# Allegro board STM32F103_RAK811_THESISNODE.brd
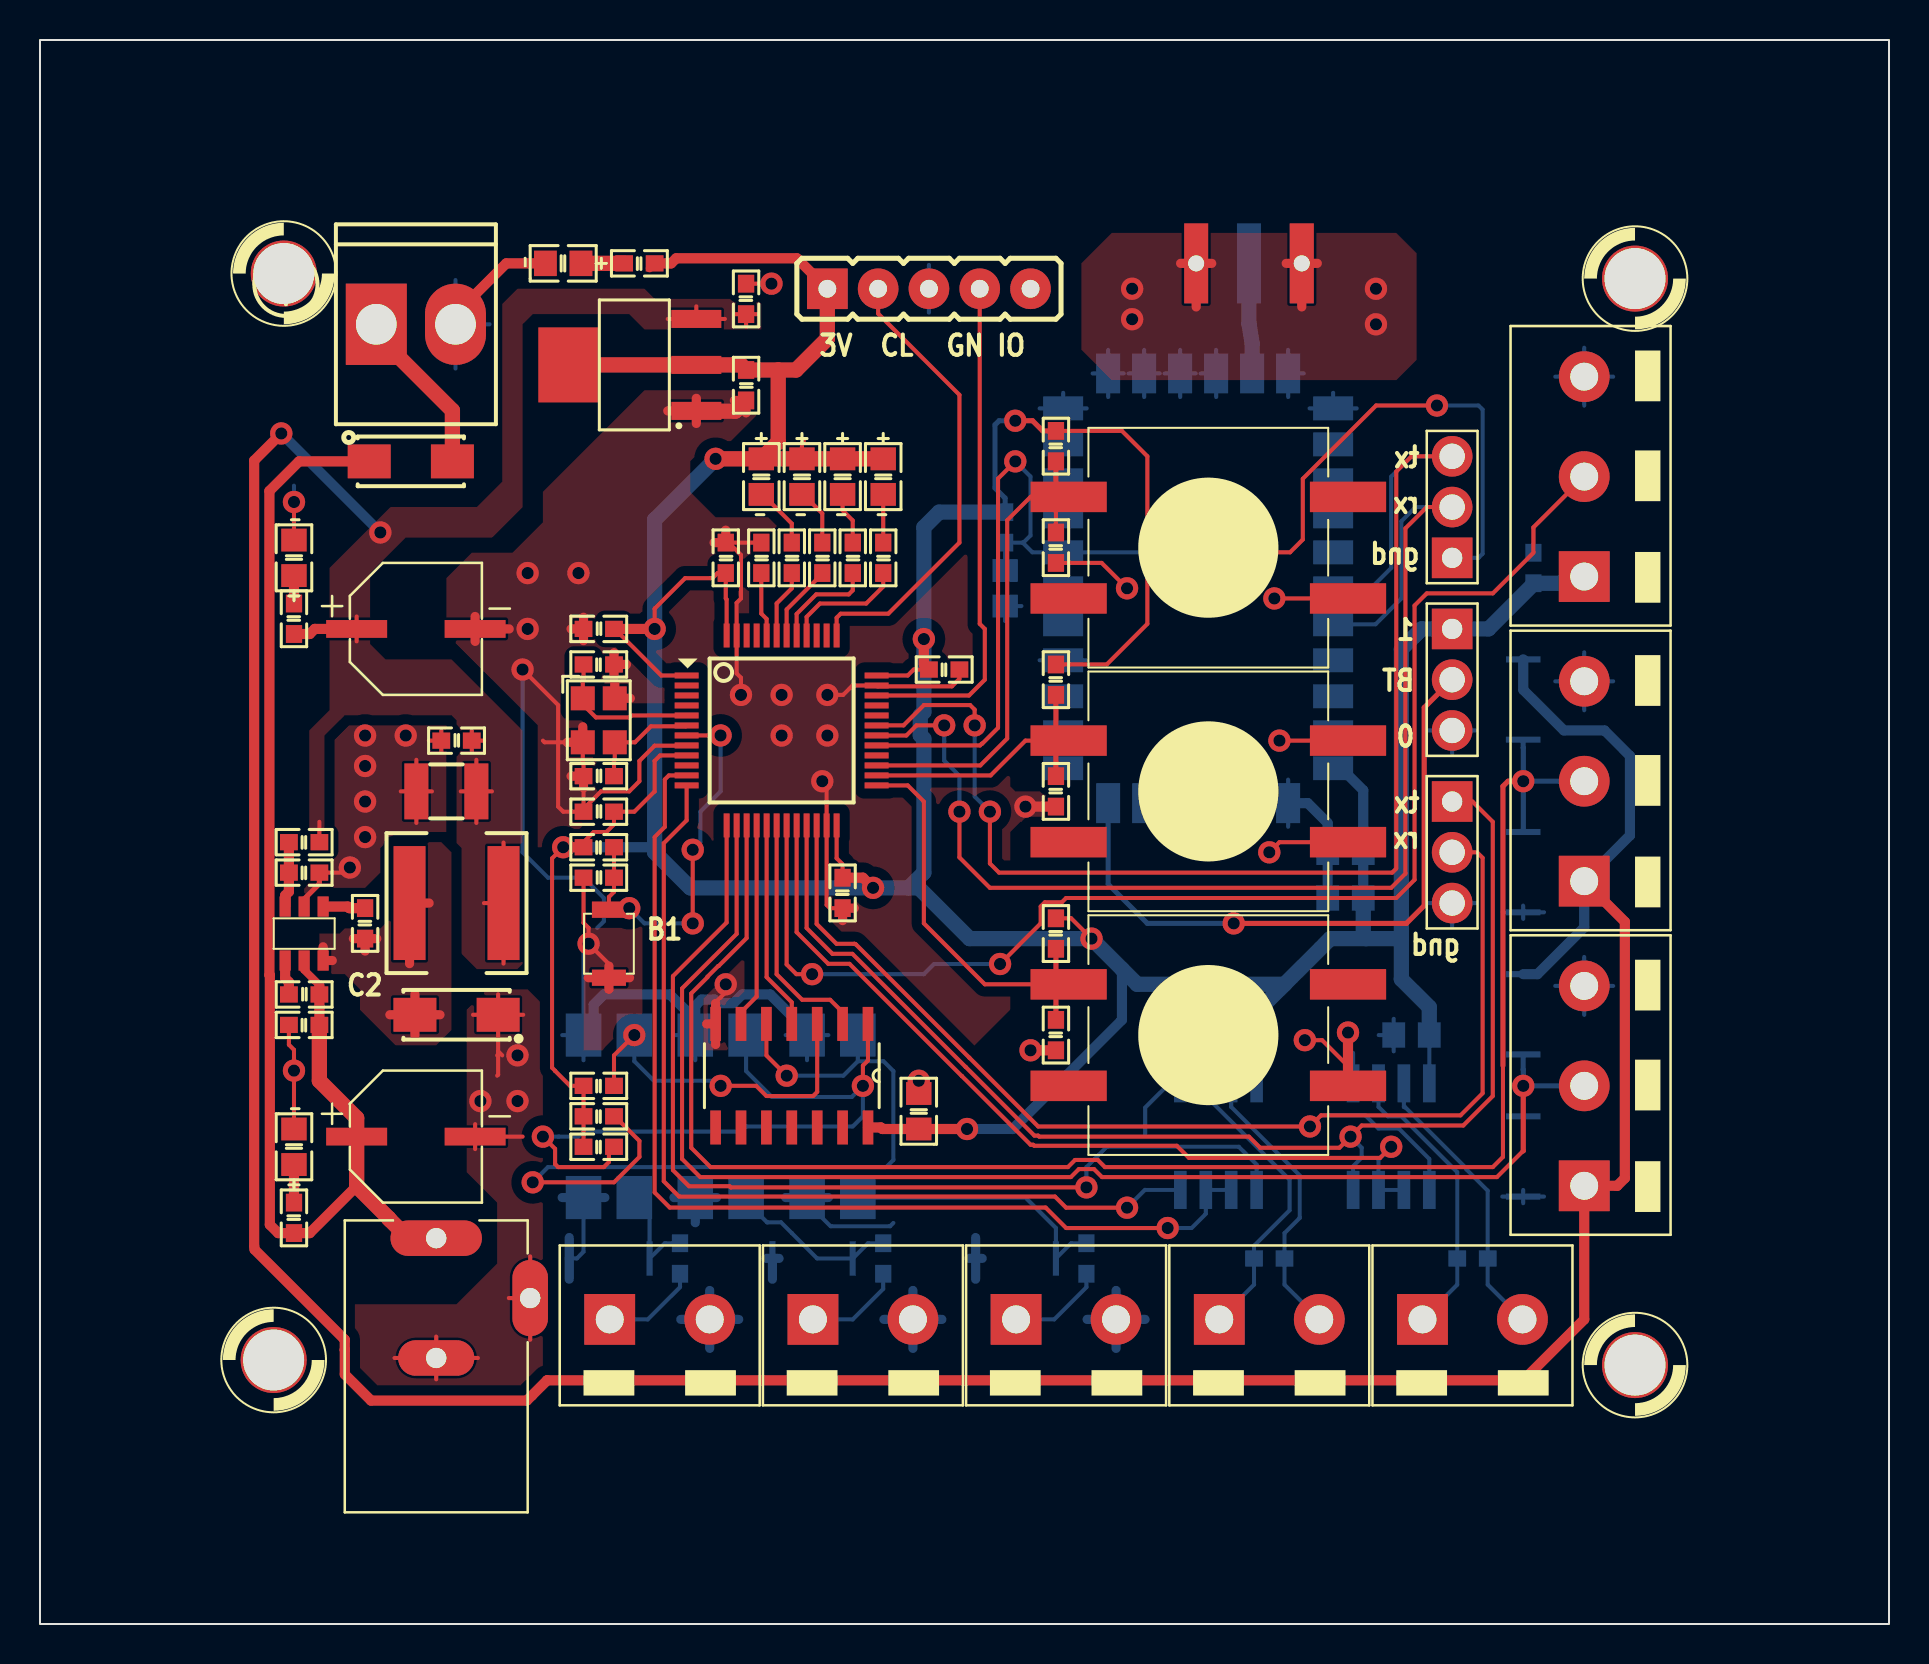
[diagram p0: board, top side]
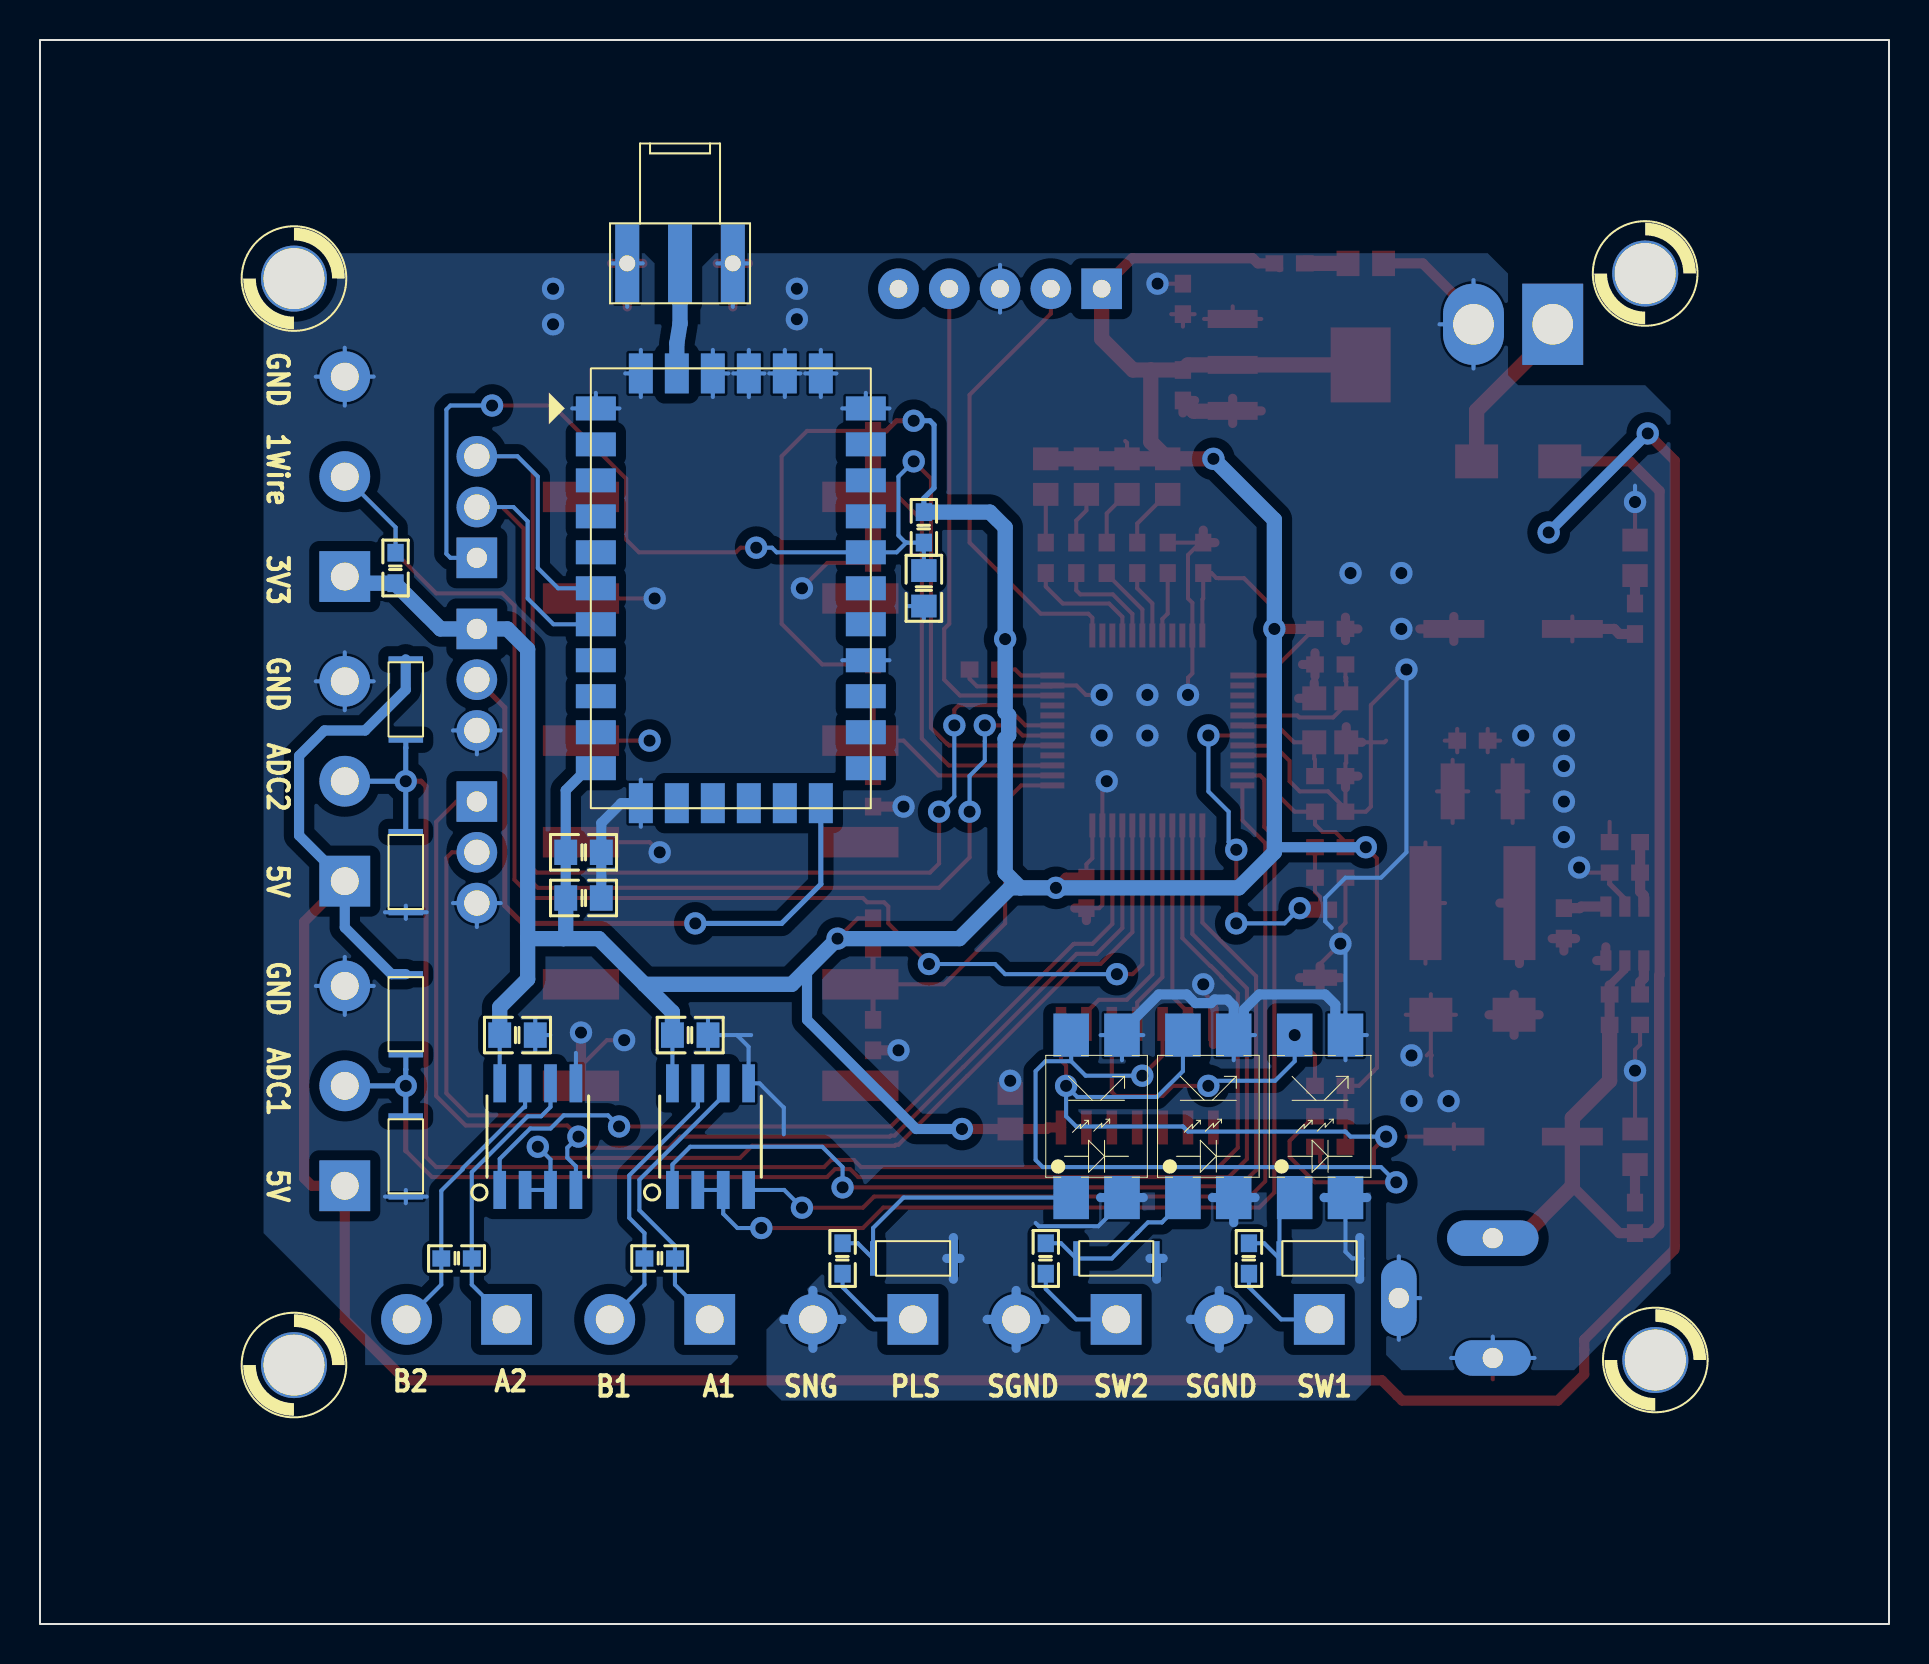
[diagram p1: board, bottom side, seen from below]

Outline 92.46 x 79.25 mm; copper layers: TOP, BOTTOM. Coordinates in mm from the lower left corner of the outline.
Outline path: rectangle 0,0 92.46,79.25

## Design rules (mm)
constraint set DEFAULT: min track width 0.203

## Placement (name value [footprint] x y rotation side)
B1  Reset  [B3U-1000P]  28.45 34.04 270 top
C1  10nF  [C0603]  13.21 29.97 0 top
C2  10nF  [C0603]  16.26 35.05 270 top
C3  100uF/35V  [CAP_AL_D]  18.8 24.38 0 top
C4  220u/16V  [CAP_AL_D]  18.8 49.78 0 top
C5  100nF  [C0603]  20.83 44.2 180 top
C6  22u/6.3V  [CAP_1210]  20.32 41.66 180 top
C7  100nF  [C0603]  35.31 66.29 270 top
C8  100nF  [C0603]  35.31 61.98 90 top
C9  0.1uF/6.3V  [C0603]  34.29 53.34 90 top
C10  0.1uF  [C0603]  27.94 40.64 180 top
C11  0.1uF/6.3V  [C0603]  27.94 49.78 180 top
C12  0.1uF/6.3V  [C0603]  40.13 36.58 270 top
C13  0.1uF/6.3V  [C0603]  45.21 47.75 0 top
C14  18pF  [C0603]  27.94 48.01 0 top
C15  18pF  [C0603]  27.94 42.42 180 top
C16  0.1uF/6.3V  [C0603]  50.8 29.46 270 top
C17  0.1uF/6.3V  [C0603]  50.8 41.66 270 top
C18  0.1uF/6.3V  [C0603]  27.94 37.34 180 top
C19  0.1uF/6.3V  [C0603]  50.8 53.85 270 top
C20  0.1uF  [C0805]  68.58 29.46 0 bottom
C21  0.1uF  [C0805]  59.94 29.46 0 bottom
C22  0.1uF  [C0805]  43.94 25.65 270 top
C23  4.7uF  [C0805]  65.28 38.61 180 bottom
C24  0.1uF  [C0805]  65.28 36.32 180 bottom
C25  0.1uF  [C0805]  48.26 51.82 270 bottom
D1  1N4007  [DO214AC_SMA]  18.54 58.17 0 top
D2  1N5819  [DO214AC_SMA]  20.83 30.48 180 top
D3  LED  [LED0805]  12.7 23.88 90 top
D4  LED  [LED0805]  12.7 53.34 90 top
D5  LED  [LED0805]  26.16 68.07 180 top
D6  LED  [LED0805]  42.16 57.4 270 top
D7  LED  [LED0805]  40.13 57.4 270 top
D8  LED  [LED0805]  38.1 57.4 270 top
D9  LED  [LED0805]  36.07 57.4 270 top
D10  1N4007  [SOD80]  74.17 32.51 0 bottom
D11  1N4007  [SOD80]  74.17 25.4 0 bottom
D12  1N4007  [SOD80]  40.64 18.29 270 bottom
D13  1N4007  [SOD80]  74.17 48.26 0 bottom
D14  1N4007  [SOD80]  30.48 18.29 270 bottom
D15  1N4007  [SOD80]  74.17 39.62 0 bottom
D16  1N4007  [SOD80]  50.8 18.29 270 bottom
E1  ANTENNA_OPTION1  [SMA_EDGE]  60.45 68.07 90 bottom
J1  BAT  [HEADER2-PITCH3P96-B2P_VH]  18.8 65.02 0 top
J2  12VDC  [CONN_JACK_DC]  19.81 19.3 270 top
J3  JTAG/STSW  [HEADER_5]  39.37 66.8 0 top
J4  MCU_DBG  [HEADER3PITCH100MIL]  70.61 38.61 270 top
J5  RAS485_MASTER  [DOMINO2_5]  61.47 15.24 0 top
J6  RS485_SLAVE  [DOMINO2_5]  71.63 15.24 0 top
J7  ANALOG_IN1  [DOMINO3_5]  77.22 26.92 90 top
J8  SW_IN1  [DOMINO2_5]  41.15 15.24 0 top
J9  ANALOG_IN2  [DOMINO3_5]  77.22 42.16 90 top
J10  SW_IN2  [DOMINO2_5]  30.99 15.24 0 top
J11  ONEWIRE  [DOMINO3_5]  77.22 57.4 90 top
J12  PULSE_IN  [DOMINO2_5]  51.31 15.24 0 top
J13  RAK_BOOT  [HEADER3PITCH100MIL]  70.61 47.24 270 top
J14  RAK_DBG  [HEADER3PITCH100MIL]  70.61 55.88 90 top
L1  8.8uH/1.7A  [IND_6X6MM]  20.83 36.07 0 top
MH1  HOLE 4mm  [MH_3MM_1]  12.19 67.56 0 top
MH2  HOLE 4mm  [MH_3MM_1]  11.68 13.21 0 top
MH3  HOLE 4mm  [MH_3MM_1]  79.76 12.95 0 top
MH4  HOLE 4mm  [MH_3MM_1]  79.76 67.31 0 top
R1  10K  [R0603]  13.21 31.5 180 top
R2  4k7  [R0603]  12.7 20.32 270 top
R3  4k7  [R0603]  12.7 50.29 270 top
R4  4k7  [R0603]  29.97 68.07 0 top
R5  49.9K  [R0603]  13.21 39.12 0 top
R6  10K  [R0603]  13.21 37.59 0 top
R7  4k7  [R0603]  36.07 53.34 90 top
R8  4k7  [R0603]  42.16 53.34 90 top
R9  4k7  [R0603]  40.64 53.34 90 top
R10  4k7  [R0603]  39.12 53.34 90 top
R11  4k7  [R0603]  37.59 53.34 90 top
R12  4.7K  [R0603]  27.94 38.86 0 top
R13  10K  [R0603]  50.8 34.54 270 top
R14  10K  [R0603]  50.8 47.24 270 top
R15  10K  [R0603]  50.8 58.93 270 top
R16  100R  [R0603]  71.63 18.29 0 bottom
R17  100R  [R0603]  61.47 18.29 0 bottom
R18  1K  [R0603]  42.16 18.29 270 bottom
R19  1K  [R0603]  32 18.29 270 bottom
R20  10K  [R0603]  74.68 52.83 270 bottom
R21  1K  [R0603]  52.32 18.29 270 bottom
R22  10K  [R0603]  48.26 54.86 270 bottom
R23  100R  [R0603]  27.94 23.88 0 top
R24  100R  [R0603]  27.94 26.92 0 top
R25  100R  [R0603]  27.94 25.4 0 top
SW1  DETECT SW  [TACT_SWITCH_12X12X7MM_SMD]  58.42 29.46 270 top
SW2  DETECT SW  [TACT_SWITCH_12X12X7MM_SMD]  58.42 41.66 270 top
SW3  DETECT SW  [TACT_SWITCH_12X12X7MM_SMD]  58.42 53.85 270 top
U1  AP3211  [SOT23-6]  13.21 34.54 270 top
U2  LM1117 5V  [SOT-223]  29.72 62.99 0 top
U3  STM32F103C8T6  [LQFP_48]  37.08 44.7 270 top
U4  MAX485  [SOIC-8]  58.93 24.38 180 bottom
U5  MAX485  [SOIC-8]  67.56 24.38 180 bottom
U6  Opto  [OPTOSMD]  34.04 25.4 180 bottom
U7  74HC14  [SO_14]  37.59 27.43 270 top
U8  Opto  [OPTOSMD]  28.45 25.4 180 bottom
U9  Opto  [OPTOSMD]  39.62 25.4 180 bottom
U10  -  [RAK811]  57.91 51.82 180 bottom
Y1  12M-18ppm  [CRY3225_M]  27.94 45.21 90 top

## Library data of the parts
B1 = SW PUSHBUTTON-SPST-2_0
C1 C2 C7 C8 C20-C25 = CAP NP
C3 C4 = CAP
C5 = Cap 0603
C6 = CAP NP: User Part Number: PartNr
C9-C19 = CAP NP_0
D1 D10-D16 = DIODE
D2 = SS34_2
D3-D9 = LED_0
E1 = ANTENNA_1
J1 J5 J6 J8 J10 J12 = HEADER 2
J2 = CONN JACK PWR: User Part Number: X; Tolerance: X
J3 = HEADER 5
J4 J7 J9 J11 J13 J14 = HEADER 3
L1 = INDUCTOR
MH1-MH4 = MOUNTING HOLE
R1 R5 R6 = RES-SM0402_0
R2-R4 R7-R11 R13-R25 = Resistor 0603
R12 = RESISTOR_0
SW1-SW3 = SW PUSHBUTTON-SPST-2
U1 = PMIC_SOT23-6
U2 = RT9193-33GB_1
U3 = STM32F103C8T6
U4 U5 = MAX485_1
U6 U8 U9 = Opto
U7 = 74HC14
U10 = RAK811
Y1 = CRYSTAL-4_0

## Footprints (pads in the part's own frame, mm; a bottom-side part is the same pattern mirrored in y, then rotated)
B3U-1000P
  rect 0.813x1.702 smd: 1(-1.702,0) 2(1.702,0)
C0603
  rect 0.889x0.813 smd: 1(-0.762,0) 2(0.762,0)
C0805
  rect 1.143x1.27 smd: 1(-0.889,0) 2(0.889,0)
CAP_1210
  rect 1.2x2.8 smd: 1(-1.5,0) 2(1.5,0)
CAP_AL_D
  rect 3.048x0.889 smd: 1(-2.962,0) 2(2.962,0)
CONN_JACK_DC
  oval 1.778x4.572 hole 1.016: 1(0,0)
  oval 1.778x3.81 hole 1.016: 2(5.994,0)
  oval 3.81x1.778 hole 1.016: 3(2.997,4.699)
CRY3225_M
  rect 1.2x1.2 smd: 1(1.1,0.8) 2(-1.101,0.8) 3(-1.101,-0.8) 4(1.1,-0.8)
DO214AC_SMA
  rect 2.15x1.696 smd: 1(-2.08,0) 2(2.08,0)
DOMINO2_5
  rect 2.54x2.54 hole 1.397: 1(-2.5,0)
  round 2.54 hole 1.397: 2(2.5,0)
DOMINO3_5
  rect 2.54x2.54 hole 1.397: 1(-5,0)
  round 2.54 hole 1.397: 2(0,0) 3(5,0)
HEADER2-PITCH3P96-B2P_VH
  rect 3.048x4.064 hole 2.032: 1(-1.98,0)
  oval 3.048x4.064 hole 2.032: 2(1.98,0)
HEADER3PITCH100MIL
  rect 2.032x2.032 hole 1.016: 1(-2.54,0)
  round 2.032 hole 1.27: 2(0,0) 3(2.54,0)
HEADER_5
  rect 2.032x2.032 hole 0.889: 1(0,0)
  round 2.032 hole 0.889: 2(2.54,0) 3(5.08,0) 4(7.62,0) 5(10.16,0)
IND_6X6MM
  rect 1.6x5.7 smd: 1(-2.35,0) 2(2.35,0)
LED0805
  rect 1.143x1.27 smd: 1(-0.889,0) 2(0.889,0)
LQFP_48
  rect 0.3x1.2 smd: 1(-2.75,-4.75) 2(-2.25,-4.75) 3(-1.75,-4.75) 4(-1.25,-4.75) 5(-0.75,-4.75) 6(-0.25,-4.75) 7(0.25,-4.75) 8(0.75,-4.75) 9(1.25,-4.75) 10(1.75,-4.75) 11(2.25,-4.75) 12(2.75,-4.75) 25(2.75,4.75) 26(2.25,4.75) 27(1.75,4.75) 28(1.25,4.75) 29(0.75,4.75) 30(0.25,4.75) 31(-0.25,4.75) 32(-0.75,4.75) 33(-1.25,4.75) 34(-1.75,4.75) 35(-2.25,4.75) 36(-2.75,4.75)
  rect 1.2x0.3 smd: 13(4.75,-2.75) 14(4.75,-2.25) 15(4.75,-1.75) 16(4.75,-1.25) 17(4.75,-0.75) 18(4.75,-0.25) 19(4.75,0.25) 20(4.75,0.75) 21(4.75,1.25) 22(4.75,1.75) 23(4.75,2.25) 24(4.75,2.75) 37(-4.75,2.75) 38(-4.75,2.25) 39(-4.75,1.75) 40(-4.75,1.25) 41(-4.75,0.75) 42(-4.75,0.25) 43(-4.75,-0.25) 44(-4.75,-0.75) 45(-4.75,-1.25) 46(-4.75,-1.75) 47(-4.75,-2.25) 48(-4.75,-2.75)
MH_3MM_1
  round 3.302 hole 3.048: 1(0,0)
OPTOSMD
  rect 1.778x2.159 smd: 1(-1.27,-4.064) 2(1.27,-4.064) 3(1.27,4.064) 4(-1.27,4.064)
R0603
  rect 0.889x0.813 smd: 1(-0.762,0) 2(0.762,0)
RAK811
  rect 2x1.2 smd: 1(-6.75,9) 2(-6.75,7.2) 3(-6.75,5.4) 4(-6.75,3.6) 5(-6.75,1.8) 6(-6.75,0) 7(-6.75,-1.8) 8(-6.75,-3.6) 9(-6.75,-5.4) 10(-6.75,-7.2) 11(-6.75,-9) 18(6.75,-9) 19(6.75,-7.2) 20(6.75,-5.4) 21(6.75,-3.6) 22(6.75,-1.8) 23(6.75,0) 24(6.75,1.8) 25(6.75,3.6) 26(6.75,5.4) 27(6.75,7.2) 28(6.75,9)
  rect 1.2x2 smd: 12(-4.5,-10.75) 13(-2.7,-10.75) 14(-0.9,-10.75) 15(0.9,-10.75) 16(2.7,-10.75) 17(4.5,-10.75) 29(4.5,10.75) 30(2.7,10.75) 31(0.9,10.75) 32(-0.9,10.75) 33(-2.7,10.75) 34(-4.5,10.75)
SMA_EDGE
  rect 4x1.2 hole 0.8: 1(0,2.64) 3(0,-2.64)
  rect 4x1.2 smd: 2(0,0)
SO_14
  rect 1.702x0.533 smd: 1(-2.591,3.81) 2(-2.591,2.54) 3(-2.591,1.27) 4(-2.591,0) 5(-2.591,-1.27) 6(-2.591,-2.54) 7(-2.591,-3.81) 8(2.591,-3.81) 9(2.591,-2.54) 10(2.591,-1.27) 11(2.591,0) 12(2.591,1.27) 13(2.591,2.54) 14(2.591,3.81)
SOD80
  rect 1.727x0.305 smd: 1(0,0) 2(-0.004,4.016)
SOIC-8
  rect 0.635x1.905 smd: 1(-1.905,-2.667) 2(-0.635,-2.667) 3(0.635,-2.667) 4(1.905,-2.667) 5(1.905,2.667) 6(0.635,2.667) 7(-0.635,2.667) 8(-1.905,2.667)
SOT23-6
  rect 1.016x0.559 smd: 1(-1.35,0.95) 2(-1.35,0) 3(-1.35,-0.95) 4(1.35,-0.95) 5(1.35,0) 6(1.35,0.95)
SOT-223
  rect 2.5x0.9 smd: 1(3.1,-2.3) 2(3.1,0) 3(3.1,2.3)
  rect 3x3.75 smd: 4(-3.3,0)
TACT_SWITCH_12X12X7MM_SMD
  rect 1.524x3.81 smd: 1(-2.54,-6.985) 2(-2.54,6.985) 3(2.54,-6.985) 4(2.54,6.985)

## Nets
GND: B1.2 C1.1 C3.2 C4.2 C5.2 C6.2 C7.1 C8.1 C9.2 C10.2 C11.2 C12.2 C13.2 C14.2 C15.2 C16.2 C17.2 C18.2 C19.2 C20.1 C21.1 C22.1 C23.2 C24.2 C25.2 D2.1 D3.2(CATHODE) D4.2(CATHODE) D5.2(CATHODE) D11.2 D15.2 E1.1 E1.3(GND_2) J1.2 J2.2 J2.3 J3.3 J4.3 J7.3 J9.3 J11.3 J13.3 R6.2 R7.2 SW1.4 SW2.4 SW3.4 U1.2 U2.1 U3.8 U3.23 U3.35 U3.47(VSS__2) U4.5 U5.5 U6.3 U7.7 U8.3 U9.3 U10.1 U10.12 U10.21 U10.28 U10.29 U10.30 U10.31 U10.32 U10.34 Y1.2 Y1.4
GND_EARTH: D12.2 D14.2 D16.2 J8.2 J10.2 J12.2 U6.2 U8.2 U9.2
VCC3.3V: C8.2 C9.1 C10.1 C11.1 C12.1 C13.1 C20.2 C21.2 C22.2 C23.1 C24.1 D6.1 D7.1 D8.1 D9.1 J3.1 J11.1 J13.1 R4.2 R12.1 R13.1 R14.1 R15.1 R20.2 R22.1 R23.1 R24.1 R25.1 U2.2 U2.4 U3.1 U3.9 U3.24 U3.36 U3.48 U4.8(VCC) U5.8(VCC) U7.14(VCC) U10.11(VCC)
VCC5V: C4.1 C5.1 C6.1 C7.2 D10.1(K) D13.1(K) J7.1 J9.1 L1.2 R3.2 R5.2 U2.3(VIN)
VIN: C1.2 C3.1 D1.1(K) J2.1 R1.1 R2.2 U1.5
BOOT0: J13.2 U10.17
GPIO_BTN_0: C16.1 R13.2 SW1.1 U3.25
GPIO_BTN_1: C17.1 R14.2 SW2.1 U3.26
GPIO_BTN_2: C19.1 R15.2 SW3.1 U3.27
GPIO_LED_0: R8.1 U3.40
GPIO_LED_1: R9.1 U3.41
GPIO_LED_2: R10.1 U3.42
GPIO_LED_3: R11.1 U3.43
JTCK-SWCLK: J3.2 U3.37
JTMS-SWDIO: J3.4 U3.34
LIGHT_SEN_ADC: U3.10
NRST: B1.1 C18.1 R12.2 U3.7
OPTO_PULSE: R25.2 U7.5 U9.4
OPTO_SW_1: R23.2 U6.4 U7.1
OPTO_SW_2: R24.2 U7.3 U8.4
PULSE_IN: U3.16 U7.6
RAK811_RST: C25.1 J14.1 R22.2 U3.29 U10.24
RAK811_RX: J14.2 U3.30 U10.7
RAK811_TX: J14.3 U3.31 U10.6
RF_OUT: E1.2 U10.33
RS485_A_MASTER: J5.1 R17.1 U4.6
RS485_A_SLAVE: J6.1 R16.1 U5.6
RS485_B_MASTER: J5.2 R17.2 U4.7
RS485_B_SLAVE: J6.2 R16.2 U5.7
RS485_DI_MASTER: U3.12 U4.4
RS485_DI_SLAVE: J4.1 U3.21 U5.4
RS485_RDE_MASTER: U3.11 U4.2 U4.3
RS485_RDE_SLAVE: U3.20 U5.2 U5.3
RS485_RO_MASTER: U3.13 U4.1
RS485_RO_SLAVE: J4.2 U3.22 U5.1
SEN_ADC_1: D10.2 D11.1(K) J7.2 U3.14
SEN_ADC_2: D13.2 D15.1(K) J9.2 U3.15
SEN_ONEWIRE: J11.2 R20.1 U3.19
SW_IN_1: U3.18 U7.2
SW_IN_2: U3.17 U7.4
N8027159: D1.2 J1.1
N8037733: C15.1 U3.6 Y1.3(XOUT)
N8037737: C14.1 U3.5 Y1.1
N8037917: U3.32
N8051947: U3.46
N8065468: R7.1 U3.44
N8080772: D12.1(K) R18.1 U6.1
N8086219: J8.1 R18.2
N8086247: J10.1 R19.2
N8086295: D14.1(K) R19.1 U8.1
N8093255: C2.1 U1.1
N8093259: C2.2 D2.2(CATHODE) L1.1 U1.6(SW)
N8093419: R1.2 U1.4
N8093431: R5.1 R6.1 U1.3
N8094931: D4.1 R3.1
N8095077: D3.1 R2.1
N8099397: J12.1 R21.2
N8099405: D16.1(K) R21.1 U9.1
N8122117: D5.1 R4.1
N81264481: D6.2(CATHODE) R8.2
N81264641: D7.2(CATHODE) R9.2
N81264801: D8.2(CATHODE) R10.2
N81264961: D9.2(CATHODE) R11.2

Pads without a net: J3 5; MH1 1; MH2 1; MH3 1; MH4 1; SW1 2 3; SW2 2 3; SW3 2 3; U3 2 3 4 28 33 38 39 45; U7 8 9 10 11 12 13; U10 2 3 4 5 8 9 10 13 14 15 16 18 19 20 22 23 25 26 27

## Via types
v1: diameter 1.118, hole 0.61, TOP to BOTTOM, 75 vias

## Routing (per net, layer and track width the routed paths; a pad name or vN(x,y) marks a point on that pad's centre or on a via; arc(x,y) is an arc through that point)
GND: length 306
  TOP w0.203: SW2.4 61.98,39.12 v1(61.47,38.61) ; 18.04,41.66 C6.2 ; C6.2 18.82,43.23 ; C6.2 18.82,40.08 ; C6.2 19.6,41.66 ; 12.7,24.76 v1(12.7,27.69) 12.7,28.73 12.45,28.98 C1.1 ; 21.76,23.76 C3.2 ; C3.2 21.76,25.01 ; C3.2 24.13,24.38 ; 21.65,30.48 D2.1 ; D2.1 22.91,31.51 ; D2.1 24.16,30.48 ; D2.1 22.91,28.65 ; 25.15,44.2 25.23,44.11 26.36,44.11 ; 27.18,40.78 28.05,41.66 29.46,41.66 29.97,42.16 29.97,43.18 30.73,43.94 32.32,43.94 U3.8 ; 27.18,40.78 27.18,41.83 ; 27.18,40.78 C10.2 26.16,40.64 25.91,40.89 25.91,45.97 v1(24.13,47.75) ; 23.44,16.31 J2.3 ; J2.3 24.51,14.22 ; J2.3 24.51,18.39 ; 22.86,27.43 22.91,27.48 22.91,28.5 ; C13.2 45.97,47.29 45.6,46.91 41.88,46.91 U3.35 40.63,46.95 40.16,46.48 v1(39.37,46.48) ; 65.41,27.91 64.11,29.21 v1(63.25,29.21) ; 22.91,28.5 22.86,28.45 ; 22.91,28.5 22.91,28.65 ; v1(39.12,42.16) 39.33,41.95 U3.23 39.33,35.98 39.5,35.81 C12.2 ; C15.2 27.18,43.05 27.14,43.09 Y1.2 ; v1(54.36,51.82) 53.09,53.09 C19.2 ; 12.7,54.23 v1(12.7,56.13) ; 19.81,12.24 J2.2 ; J2.2 21.9,13.31 ; J2.2 17.73,13.31 ; J2.2 19.81,14.38 ; 23.11,28.45 22.91,28.65 ; 34.43,54.1 35.05,53.48 35.05,51.31 34.83,51.09 U3.47 34.83,47.56 35.05,47.34 v1(35.05,46.48) ; 34.43,54.1 C9.2 ; 34.43,54.1 R7.2 ; 20.07,43.61 C5.2 ; C5.2 20.07,44.78 ; C5.2 19.44,44.2 ; R6.2 15.24,37.59 v1(15.49,37.85) ; SW3.4 v1(61.72,51.31) ; v1(34.29,32) 34.54,31.75 34.43,31.75 33.78,31.1 33.78,31.05 ; C7.1 v1(36.58,67.06) ; C18.2 27.18,35.08 27.43,34.82 v1(27.43,34.04) 28.45,33.02 28.45,32.92
  TOP w0.254: U1.2 13.21,36.27 13.97,37.03 R6.2
  TOP w0.457: 40.13,35.19 C12.2 40.72,35.81 ; 57.81,65.89 E1.3 ; E1.3 58.59,68.07 ; E1.3 57.03,68.07 ; 33.34,30.02 U7.7 ; U7.7 33.78,28.99 ; U7.7 33.78,31.05 ; 26.36,44.11 Y1.2 27.14,44.89 ; B1.2 28.45,32.92 ; B1.2 28.45,31.75 ; B1.2 27.42,32.33 ; B1.2 29.48,32.33 ; 27.18,41.83 C15.2 26.56,42.42 ; 32.82,60.06 U2.1 ; U2.1 32.82,61.32 ; U2.1 34.25,60.69 ; U2.1 31.39,60.69 ; E1.1 63.87,68.07 ; E1.1 62.31,68.07 ; E1.1 63.09,65.89 ; 28.7,47.42 C14.2 ; C14.2 29.32,48.01 ; C14.2 28.7,48.59 ; C11.2 27.18,50.37 ; C11.2 26.56,49.78 ; C11.2 27.18,49.2 ; 21.76,49.16 C4.2 ; C4.2 21.76,50.41 ; C4.2 23.46,49.78 ; 34.29,54.72 C9.2 33.71,54.1 ; 34.72,61.21 C8.1 35.31,60.59 ; 28.74,47.09 Y1.4 29.52,46.31
  TOP w0.508: D5.2 23.32,68.07 20.78,65.53 J1.2 ; SW1.4 v1(65.41,29.59) ; C16.2 v1(49.53,28.7) ; C22.1 v1(43.94,27.18) ; v1(49.28,40.89) C17.2
  TOP w0.762: U2.1 32.84,60.68 34.77,60.68 C8.1
  BOTTOM w0.203: J2.2 19.81,14.38 ; J2.2 17.73,13.31 ; J2.2 21.9,13.31 ; J11.3 78.66,62.4 ; J11.3 77.22,63.85 ; J11.3 77.22,60.96 ; J11.3 75.77,62.4 ; 75.77,47.16 J9.3 ; J9.3 78.66,47.16 ; J9.3 77.22,45.72 ; J9.3 77.22,48.61 ; 27.86,34.82 28.19,35.15 28.19,36.32 C18.2 25.4,37.34 24.13,38.61 v1(24.13,47.75) ; 37.29,29.46 U9.3 ; U9.3 39.42,29.46 ; U9.3 38.35,28.21 ; 23.44,16.31 J2.3 ; J2.3 24.51,14.22 ; J2.3 24.51,18.39 ; U10.29 54.19,62.57 ; U10.29 53.41,63.74 ; U10.29 53.41,61.39 ; U10.29 52.63,62.57 ; J1.2 20.78,67.23 ; J1.2 20.78,62.81 ; J1.2 22.48,65.02 ; 31.7,29.46 U6.3 32.77,28.21 ; 57.61,29.46 57.02,28.88 U4.5 56.48,27.05 55.26,25.84 55.26,24.5 ; 57.61,29.46 C21.1 ; 57.61,29.46 56.9,29.46 ; C25.2 48.2,50.93 ; C25.2 49.07,50.93 ; C25.2 48.26,50.18 ; 67.69,28.65 C20.1 ; C20.1 66.94,29.46 ; C20.1 67.69,30.28 ; 77.22,30.48 J7.3 ; J7.3 78.66,31.92 ; J7.3 75.77,31.92 ; J7.3 77.22,33.37 ; 62.41,61.39 U10.34 ; U10.34 62.41,63.74 ; U10.34 63.19,62.57 ; U10.30 55.21,63.74 ; U10.30 55.21,61.39 ; U10.30 54.43,62.57 ; U10.30 55.99,62.57 ; 44.45,68 J3.3 44.45,65.61 ; C24.2 64.39,36.26 ; D11.2 74.16,21.71 ; D11.2 75.21,21.38 ; D11.2 73.12,21.38 ; D11.2 74.16,21.05 ; U10.28 52.34,60.82 ; U10.28 51.16,61.59 ; U10.28 49.98,60.82 ; U10.32 58.81,63.74 ; U10.32 58.03,62.57 ; U10.32 58.81,61.39 ; U10.31 57.79,62.57 ; U10.31 56.23,62.57 ; U10.31 57.01,61.39 ; U10.31 57.01,63.74 ; J13.3 71.81,44.7 ; J13.3 70.61,43.51 ; J13.3 69.42,44.7 ; U10.1 65.84,60.82 ; U10.1 64.66,61.59 ; U10.1 63.48,60.82 ; 49.98,48.22 U10.21 52.34,48.22 ; C21.1 59.05,28.65 ; C21.1 59.05,30.28 ; 63.09,65.89 E1.1 ; E1.1 63.87,68.07 ; E1.1 62.31,68.07 ; 62.41,39.89 U10.12 62.41,42.24 ; 57.81,65.89 E1.3 ; E1.3 57.03,68.07 ; E1.3 58.59,68.07 ; 73.12,35.61 D15.2 ; D15.2 75.21,35.61 ; D15.2 74.16,35.94 ; D15.2 74.16,35.28 ; v1(27.43,34.04) 27.18,33.78 U8.3 ; 69.42,36.07 J4.3 ; J4.3 70.61,34.87 ; J4.3 71.81,36.07 ; U8.3 26.11,29.46 ; U8.3 27.18,28.21 ; v1(12.7,56.13) 12.7,56.95 ; 65.66,28.57 U5.5
  BOTTOM w0.508: C24.2 C23.2 64.39,40.07 63.39,41.07 U10.12 ; 32.77,29.72 32.77,30.92 33.08,31.24 33.72,31.24 33.9,31.06 34.68,31.06 35.11,31.5 36.51,31.5 38.35,29.65 U9.3 ; 32.77,29.72 32.26,30.23 32.26,30.73 31.5,31.5 28.19,31.5 27.69,30.99 27.69,29.97 U8.3 ; 32.77,29.72 U6.3
  vias: v1(16.26,44.45) v1(16.26,42.93) v1(16.26,41.15) v1(16.26,39.37) v1(18.29,44.45) v1(22.02,26.16) v1(23.88,28.45) v1(23.88,26.16) v1(24.38,52.58) v1(24.38,49.78) v1(26.92,52.58) v1(37.08,46.48) v1(37.08,44.45) v1(39.37,44.45) v1(54.61,66.8) v1(54.61,65.28) v1(66.8,66.8) v1(66.8,65.02)
GND_EARTH: length 40.3
  BOTTOM w0.203: 38.35,21.08 39.54,19.9 42.51,19.9 42.67,20.07 ; U8.2 27.18,18.63 26.85,18.29 D14.2
  BOTTOM w0.457: 32.77,20.08 U6.2 ; U6.2 31.7,21.34 ; U6.2 33.83,21.34 ; D16.2 46.78,19.33 ; D16.2 46.78,17.25 ; D16.2 47.11,18.29 ; D16.2 46.45,18.29 ; 43.65,13.79 J8.2 ; J8.2 45.1,15.24 ; J8.2 43.65,16.69 ; J8.2 42.2,15.24 ; 33.49,13.79 J10.2 ; J10.2 32.04,15.24 ; J10.2 34.94,15.24 ; J10.2 33.49,16.69 ; 26.46,17.25 D14.2 26.46,19.33 ; U9.2 39.42,21.34 ; U9.2 37.29,21.34 ; U9.2 38.35,21.08 ; J12.2 53.81,16.69 ; J12.2 53.81,13.79 ; J12.2 55.26,15.24 ; J12.2 52.36,15.24 ; 36.29,18.29 D12.2 ; D12.2 36.62,17.25 ; D12.2 36.95,18.29 ; 26.11,21.34 U8.2 28.25,21.34
VCC3.3V: length 274
  TOP w0.203: 38.19,59.19 38.1,59.09 D8.1 ; R12.1 27.18,39.12 27.69,39.62 28.32,39.62 28.7,40 C10.1 29.72,40.64 30.73,41.66 30.73,43.18 31.01,43.45 U3.9 ; v1(30.73,49.78) 30.73,50.77 30.74,50.8 30.76,50.82 32.26,52.32 33.53,52.32 33.63,52.33 33.88,52.58 C9.1 34.29,51.31 34.33,51.26 U3.48 ; 50.55,47.75 R14.1 53.34,48.01 55.37,50.04 55.37,58.42 54.1,59.69 R15.1 ; U3.24 39.83,38.31 40.13,38.01 C12.1 ; v1(26.16,38.86) 25.6,38.3 25.6,27.83 25.76,27.68 25.76,27.67 26.5,26.92 R24.1 R25.1 R23.1 ; U3.36 43.39,47.45 43.69,47.75 C13.1 ; 28.74,49.78 31.07,47.45 U3.1 ; v1(52.58,34.29) 51.56,35.31 R13.1
  TOP w0.254: v1(48.77,60.2) 49.63,60.2 50.14,59.69 R15.1
  TOP w0.381: 30.48,67.82 R4.2
  TOP w0.508: v1(30.73,49.78) C11.1 ; J3.1 37.85,68.33 31.81,68.33 31.56,68.07 R4.2 ; v1(46.35,24.76) C22.2 42.13,24.76 42.05,24.84 U7.14 ; v1(41.66,36.83) 41.15,37.34 C12.1 ; C13.1 44.2,48.01 v1(44.2,49.28) ; R12.1 v1(26.16,38.86)
  TOP w0.762: J3.1 39.37,64.3 37.8,62.74 36.91,62.74 ; 36.91,62.74 36.91,59.14 D9.1 ; 36.91,62.74 C8.2 35.05,62.99 U2.2 U2.4 ; D6.1 D7.1 D8.1 D9.1 ; D9.1 v1(33.78,58.29)
  BOTTOM w0.203: U4.8 C21.2 ; C20.2 U5.8
  BOTTOM w0.254: R22.1 48.26,56.32 47.75,56.83 47.75,59.99 47.96,60.2 v1(48.77,60.2)
  BOTTOM w0.508: 54.1,32.77 54.1,30.23 48.64,24.76 v1(46.35,24.76) ; 30.73,38.61 30.48,38.86 v1(26.16,38.86) ; 66.17,36.32 66.17,41.71 65.06,42.82 U10.11
  BOTTOM w0.762: C20.2 69.47,30.86 68.07,32.26 68.07,34.29 ; J11.1 76.88,52.07 R20.2 74.68,52.03 72.43,49.78 J13.1 69.09,49.78 68.07,48.77 68.07,34.29 ; 66.29,34.29 68.07,34.29 ; 66.29,34.29 64.52,34.29 62.23,32 ; 66.29,34.29 66.17,34.42 66.17,36.32 ; R22.1 44.96,55.63 44.2,54.86 v1(44.2,49.28) 44.2,45.63 44.02,45.45 44.02,44.46 44.2,44.29 44.2,37.59 43.43,36.83 ; 62.23,32 60.83,30.61 C21.2 ; 62.23,32 54.86,32 v1(52.58,34.29) 46.48,34.29 43.94,36.83 43.43,36.83 ; 43.43,36.83 v1(41.66,36.83) 32.51,36.83 30.73,38.61 v1(30.73,49.78) 30.73,55.25 v1(33.78,58.29)
VCC5V: length 191.4
  TOP w0.203: 35.31,64.91 C7.2 ; C7.2 34.72,65.53 ; C7.2 35.89,65.53 ; R5.2 13.97,40.13 ; U2.3 32.82,65.92 ; U2.3 34.25,65.29 ; U2.3 31.39,65.29 ; 21.04,41.66 C6.1 ; C6.1 22.6,41.66 ; C6.1 21.82,43.23 ; C6.1 21.82,40.08 ; L1.2 23.18,39.1 ; L1.2 22.2,36.07 ; L1.2 23.18,33.04 ; C5.1 21.59,44.78 ; C5.1 21.59,43.61 ; C5.1 22.21,44.2 ; 15.83,50.41 C4.1 15.83,49.16
  TOP w0.508: J9.1 79.25,35.13 79.25,22.31 78.87,21.92 J7.1 77.22,15.24 74.17,12.19 25.37,12.19 25.36,12.19 25.34,12.18 24.59,11.43 24.34,11.18 16.55,11.18 15.24,12.49 15.24,13.7 15.24,13.74 15.24,14.19 15.24,14.22 15.22,14.25 10.73,18.73 10.71,18.9 10.71,58.21 v1(12.06,59.56) ; C4.1 13.74,49.78 13.49,49.53 R3.2
  BOTTOM w0.508: D10.1 74.88,32.51 77.22,34.85 J9.1 79.5,39.45 79.5,43.43 78.23,44.7 76.2,44.7 74.17,46.74 D13.1 ; v1(12.06,59.56) v1(17.02,54.61)
VIN: length 65.4
  TOP w0.381: U1.5 13.21,32.73 13.97,31.97 13.97,31.95
  TOP w0.508: C1.2 R1.1 13.97,31.95 ; D1.1 12.95,58.17 11.47,56.68 11.47,32.47 11.49,32.45 11.49,19.98 11.91,19.56 R2.2 13.49,19.56 15.83,21.9 ; 17.52,20.2 17.52,20.22 17.43,20.31
  TOP w0.762: J2.1 18.41,19.3 17.43,20.29 17.43,20.31 15.83,21.9 C3.1 15.83,25.31 13.97,27.18 C1.2
BOOT0: length 32.9
  TOP w0.254: v1(59.69,35.05) 68.33,35.05 69.22,35.94 69.22,45.85 J13.2
  BOTTOM w0.254: v1(59.69,35.05) 55.37,35.05 53.41,37.01 U10.17
GPIO_BTN_0: length 21.4
  TOP w0.203: SW1.1 47.24,32 44.2,35.05 44.2,41.15 43.39,41.95 U3.25
  TOP w0.254: C16.1 50.8,31.37 SW1.1 50.8,32.64 R13.2
GPIO_BTN_1: length 14.9
  TOP w0.203: U3.26 47.53,42.45 49.28,44.2 51.31,44.2
  TOP w0.254: C17.1 50.8,43.56 SW2.1 51.31,44.2 50.8,44.7 R14.2
GPIO_BTN_2: length 25.6
  TOP w0.203: U3.27 47.02,42.95 48.36,44.3 48.36,55.22 49.53,56.39 SW3.1 50.8,55.75 C19.1
  TOP w0.254: R15.2 50.8,57.02 SW3.1
GPIO_LED_0: length 6.1
  TOP w0.203: U3.40 38.33,50.39 39,51.05 41.31,51.05 42.16,51.9 R8.1
GPIO_LED_1: length 5.2
  TOP w0.203: R9.1 40.64,51.71 40.44,51.51 38.81,51.51 37.83,50.53 U3.41
GPIO_LED_2: length 3.9
  TOP w0.203: R10.1 39.12,52.54 37.33,50.76 U3.42
GPIO_LED_3: length 3.4
  TOP w0.203: U3.43 36.83,51.06 37.59,51.82 R11.1
JTCK-SWCLK: length 23
  TOP w0.203: J3.2 41.91,65.56 45.97,61.49 45.97,54.1 42.42,50.55 40.04,50.55 39.83,50.34 U3.37
JTMS-SWDIO: length 25.4
  TOP w0.203: U3.34 46.45,46.45 47.24,47.24 47.24,49.78 46.99,50.04 J3.4
Net_104: length 3.4
  TOP w0.203: 65.41,44.2 v1(61.98,44.2)
NRST: length 20.5
  TOP w0.203: v1(32.64,38.74) v1(32.64,35.05) ; R12.2 C18.1 28.7,36.63 28.45,36.37 B1.1 ; B1.1 29.53,35.74 ; B1.1 28.52,35.81 v1(29.46,35.81) ; U3.7 v1(34.03,44.45)
  BOTTOM w0.203: v1(29.46,35.81) 30.23,35.05 v1(32.64,35.05) ; v1(34.03,44.45) 34.03,41.65 33.02,40.64 33.02,39.12 v1(32.64,38.74)
OPTO_PULSE: length 41.5
  TOP w0.203: R25.2 28.74,25.4 29.97,24.17 29.97,23.37 28.7,22.1 v1(24.64,22.1) ; U7.5 36.32,28.45 v1(37.34,27.43)
  BOTTOM w0.203: v1(37.34,27.43) 40.17,27.43 40.89,28.16 ; 40.89,28.16 42.18,28.16 42.67,27.66 42.67,23.22 42.31,22.86 41.66,22.86 25.97,22.86 25.93,22.86 25.4,22.86 v1(24.64,22.1) ; 40.89,28.16 U9.4
OPTO_SW_1: length 34.9
  TOP w0.203: U7.1 41.4,28.19 41.15,27.94 v1(41.15,26.92) ; R23.2 28.45,23.62 28.45,23.11 28.19,22.86 25.91,22.86 25.76,23.01 25.76,23.06 25.76,23.77 v1(25.15,24.38)
  BOTTOM w0.203: v1(25.15,24.38) 25.93,24.38 26.92,24.38 27.16,24.62 27.18,24.64 27.2,24.64 35.05,24.64 35.29,24.87 35.31,24.89 35.33,24.89 40.64,24.89 41.15,25.4 v1(41.15,26.92) 40.59,26.37 36.6,26.37 35.31,27.66 U6.4
OPTO_SW_2: length 17.7
  TOP w0.203: v1(29.72,29.46) 28.7,28.45 R24.2 ; v1(34.04,26.92) 35.81,26.92 36.32,26.42 38.66,26.42 38.86,26.62 U7.3
  BOTTOM w0.203: v1(29.72,29.46) 29.72,28.16 30.7,27.18 33.83,27.18 34.04,26.97 v1(34.04,26.92)
PULSE_IN: length 10.3
  TOP w0.203: U7.6 35.05,30.61 35.83,31.39 U3.16
RAK811_RST: length 64.1
  TOP w0.203: U3.29 47,43.95 47.09,44.04 47.11,44.04 47.9,44.83 47.9,57.3 v1(48.77,58.17) ; v1(69.85,60.96) 66.81,60.96 63.14,57.3 63.14,54.25 62.51,53.62 57.66,53.62 57.43,53.85 v1(56.64,53.85)
  BOTTOM w0.203: v1(48.77,58.17) 49.53,57.4 49.53,54.46 49.17,54.1 49.14,54.1 ; 49.14,54.1 49.62,53.62 U10.24 55.62,53.62 55.85,53.85 v1(56.64,53.85) ; 49.14,54.1 R22.2 48.26,52.7 ; v1(69.85,60.96) 71.93,60.96 72.14,60.76 72.14,53.54 71.93,53.34 J14.1
RAK811_RX: length 64.4
  TOP w0.203: J14.2 69.34,55.88 68.28,54.81 68.28,37.54 67.56,36.83 47.5,36.83 45.97,38.35 v1(45.97,40.64) ; v1(45.21,44.96) 43.83,44.96 43.32,44.45 41.84,44.45 U3.30
  BOTTOM w0.203: J14.2 68.78,55.88 68.07,55.17 68.07,51.31 66.78,50.02 U10.7 ; v1(45.97,40.64) 45.97,42.43 45.21,43.19 45.21,44.17 v1(45.21,44.96)
RAK811_TX: length 68.4
  TOP w0.203: U3.31 41.84,44.96 43.18,44.96 44.2,45.97 46.51,45.97 46.74,45.75 v1(46.74,44.96) ; v1(47.5,40.64) 47.5,38.05 47.96,37.59 67.61,37.59 67.82,37.8 67.82,57.66 68.58,58.42 J14.3
  BOTTOM w0.203: U10.6 66.55,51.82 67.56,52.83 67.56,57.4 68.58,58.42 J14.3 ; v1(47.5,40.64) 46.74,41.4 v1(46.74,44.96)
RF_OUT: length 5.5
  BOTTOM w0.762: E1.2 60.45,65.06 60.61,64.07 U10.33
RS485_A_MASTER: length 15
  BOTTOM w0.203: U4.6 58.29,26.42 62.48,22.23 62.48,20.7 60.71,18.92 R17.1 60.71,16.98 J5.1
RS485_A_SLAVE: length 14.6
  BOTTOM w0.203: U5.6 66.93,25.87 67.4,25.4 68.07,25.4 70.87,22.61 R16.1 70.87,16.98 J6.1
RS485_B_MASTER: length 14.3
  BOTTOM w0.203: J5.2 62.23,16.98 R17.2 62.23,19.56 62.99,20.32 62.99,22.44 59.56,25.87 U4.7
RS485_B_SLAVE: length 14.3
  BOTTOM w0.203: J6.2 72.39,16.98 R16.2 72.39,21.68 71.32,22.75 71.32,22.8 68.26,25.86 68.21,25.86 68.2,25.87 U5.7
RS485_DI_MASTER: length 47
  TOP w0.203: v1(54.36,20.83) 51.31,20.83 50.75,21.39 31.95,21.39 31.19,22.15 31.19,39.07 32.33,40.21 U3.12
  BOTTOM w0.203: 57.02,21.72 55.24,21.72 v1(54.36,20.83)
RS485_DI_SLAVE: length 64.3
  TOP w0.203: J4.1 71.63,41.15 72.64,40.13 72.64,26.42 71.17,24.94 66.09,24.94 v1(65.53,24.38) 64.97,23.83 61.01,23.83 60.45,24.38 49.96,24.38 49.91,24.43 49.72,24.43 46.28,27.87 46.28,27.87 40.62,33.53 39.62,33.53 38.33,34.82 U3.21
  BOTTOM w0.203: v1(65.53,24.38) 66.09,23.83 66.09,23.33 65.66,22.9 65.66,21.72
RS485_RDE_MASTER: length 53.1
  TOP w0.203: v1(56.39,19.81) 51.31,19.81 50.28,20.84 31.49,20.84 30.73,21.59 30.73,39.37 31.24,39.88 31.24,42.25 31.45,42.45 U3.11
  BOTTOM w0.203: v1(56.39,19.81) 57.58,19.81 58.29,20.52 58.29,21.72 59.56,21.72
RS485_RDE_SLAVE: length 43.7
  TOP w0.203: U3.20 37.83,34.61 39.42,33.03 40.48,33.03 46.09,27.42 46.09,27.42 49.53,23.98 49.66,23.98 49.71,23.93 56.85,23.93 57.45,23.32 67.01,23.32 v1(67.56,23.88)
  BOTTOM w0.203: 68.2,21.72 66.93,21.72 66.93,23.24 v1(67.56,23.88)
RS485_RO_MASTER: length 51
  TOP w0.203: v1(52.32,21.84) 34.54,21.84 34.49,21.9 32.45,21.9 31.65,22.71 31.65,32.41 34.33,35.1 U3.13
  BOTTOM w0.203: v1(52.32,21.84) 52.32,22.86 53.34,23.88 59.94,23.88 60.83,22.99 60.83,21.72
RS485_RO_SLAVE: length 65.2
  TOP w0.203: J4.2 71.86,38.61 72.14,38.33 72.14,26.55 71.03,25.45 64.06,25.45 v1(63.5,24.89) 49.91,24.89 46.47,28.33 46.47,28.33 40.82,33.98 40.79,34 40.76,34.02 40.73,34.03 40.71,34.03 39.83,34.03 38.83,35.03 U3.22
  BOTTOM w0.203: v1(63.5,24.89) 64.06,25.45 66.27,25.45 66.93,24.79 67.94,24.79 69.47,23.26 69.47,21.72
SEN_ADC_1: length 70.5
  TOP w0.203: 74.16,23.67 72.85,22.36 53.1,22.36 52.7,22.76 51.95,22.76 51.55,22.36 33.01,22.36 32.11,23.27 32.11,31.8 34.83,34.53 U3.14
  TOP w0.254: 74.16,23.67 74.17,23.68 v1(74.17,26.92)
  BOTTOM w0.254: v1(74.17,26.92) 74.17,27.74 74.16,27.74 D10.2 ; v1(74.17,26.92) D11.1 ; v1(74.17,26.92) J7.2
SEN_ADC_2: length 86.1
  TOP w0.203: 73.15,27.94 73.15,23.37 72.64,22.86 53.25,22.86 52.89,23.22 51.76,23.22 51.4,22.86 33.53,22.86 32.56,23.83 32.56,31.55 33.38,32.36 33.38,32.38 33.91,32.92 33.93,32.92 35.33,34.32 U3.15
  TOP w0.254: v1(74.17,42.16) 73.41,42.16 73.15,41.91 73.15,27.94
  BOTTOM w0.254: D13.2 74.16,43.84 74.17,43.83 v1(74.17,42.16) ; v1(74.17,42.16) J9.2 ; v1(74.17,42.16) D15.1
SEN_ONEWIRE: length 71.5
  TOP w0.203: v1(38.61,32.51) 37.82,32.51 37.33,33 U3.19 ; J11.2 74.68,54.86 R20.1 72.64,51.56 69.34,51.56 68.73,50.95 68.73,37.24 67.82,36.32 51.31,36.32 51.09,36.11 50.25,36.11 50.04,35.9 50.04,35.05 v1(48.01,33.02)
  BOTTOM w0.203: v1(38.61,32.51) 44.2,32.51 44.7,33.02 v1(48.01,33.02) ; J11.2 74.68,54.86 R20.1
SW_IN_1: length 12.1
  TOP w0.203: U7.2 40.13,30.61 39.51,31.23 38.11,31.23 36.83,32.51 U3.18
SW_IN_2: length 10.5
  TOP w0.203: U7.4 37.59,31.1 36.33,32.36 U3.17
N8027159: length 8.4
  TOP w0.762: J1.1 16.82,64.52 20.62,60.71 D1.2
N8037733: length 5.7
  TOP w0.203: U3.6 32.29,44.91 30.55,44.91 29.75,44.11 Y1.3 28.74,43.28 28.7,43.24 C15.1
N8037737: length 7.8
  TOP w0.203: 27.18,47.37 27.18,47.18 27.14,47.14 ; 27.18,47.37 C14.1 ; 27.18,47.37 27.14,47.33 27.14,47.14 ; 27.14,47.14 Y1.1 27.14,46.01 27.8,45.36 29.49,45.36 29.59,45.45 U3.5
N8065468: length 3.2
  TOP w0.203: R7.1 36.07,50.55 36.33,50.28 U3.44
N8080772: length 8.5
  BOTTOM w0.203: U6.1 35.31,21.15 36.35,20.1 36.36,20.1 36.37,20.09 37.06,20.09 37.59,19.56 38.86,18.29 D12.1 41.4,19.05 R18.1
N8086219: length 4.9
  BOTTOM w0.203: R18.2 42.16,16.76 40.64,15.24 J8.1
N8086247: length 4.9
  BOTTOM w0.203: J10.1 30.39,15.24 32,16.85 R19.2
N8086295: length 5.2
  BOTTOM w0.203: R19.1 31.24,19.05 D14.1 30.48,20.57 U8.1
N8093255: length 2.1
  TOP w0.508: C2.1 15.47,35.81 15.39,35.89 U1.1
N8093259: length 11.5
  TOP w0.457: 18.48,33.04 L1.1 19.46,36.07 ; D2.2 20,30.48 ; D2.2 17.49,30.48 ; D2.2 18.75,31.51 ; D2.2 18.75,29.45 ; C2.2 16.84,34.29 ; C2.2 16.26,33.67 ; C2.2 15.67,34.29 ; 14.62,33.19 U1.6 14.16,33.88
N8093419: length 1.8
  TOP w0.508: R1.2 12.45,32.11 12.26,32.3 U1.4
N8093431: length 3.3
  TOP w0.508: R5.1 R6.1 12.45,36.64 12.26,36.45 U1.3
N8094931: length 1.4
  TOP w0.508: R3.1 D4.1
N8095077: length 1.9
  TOP w0.508: R2.1 D3.1
N8099397: length 4.9
  BOTTOM w0.203: R21.2 52.32,16.85 50.71,15.24 J12.1
N8099405: length 13.9
  BOTTOM w0.203: R21.1 51.56,19.05 D16.1 50.8,19.81 49.28,21.34 U9.1
N8122117: length 2.2
  TOP w0.762: R4.1 27.05,68.07
N81264481: length 2.4
  TOP w0.203: R8.2 D6.2
N81264641: length 2.6
  TOP w0.203: R9.2 40.64,55.21 40.13,55.71 D7.2
N81264801: length 2.9
  TOP w0.203: D8.2 38.16,56.51 39.12,55.56 R10.2
N81264961: length 3.1
  TOP w0.203: R11.2 37.59,55.05 36.13,56.51 D9.2

## Copper pours and planes (outline as drawn; the poured copper is in the pictures)
GND on TOP: 20.57,39.88 20.57,44.7 20.07,45.21 15.49,45.21 14.73,44.45 14.73,38.35 14.48,38.1 13.46,38.1 13.46,37.08 12.95,36.58 12.95,35.56 13.46,35.56 13.46,36.32 13.97,36.83 16.26,36.83 17.27,37.85 17.27,38.86 17.78,39.37 20.07,39.37
GND on TOP: 30.23,61.72 35.56,61.72 35.81,61.47 35.81,60.45 34.54,59.18 33.53,59.18 32.51,58.17 32.51,56.64 33.78,55.37 45.47,55.37 48.51,52.32 48.51,41.91 48.77,41.66 51.56,41.66 52.32,40.89 52.32,40.39 52.07,40.13 49.02,40.13 48.51,39.62 48.51,30.73 46.48,28.7 27.18,28.7 27.18,38.86 24.89,38.86 24.89,44.96 20.32,49.53 20.32,52.32 21.59,53.59 23.62,53.59 25.15,55.12 25.15,56.64 ; 9 cut-outs
GND on TOP: 15.75,16 20.83,16 22.86,18.03 22.86,21.08 21.34,22.61 21.34,30.73 22.35,31.75 24.38,31.75 25.15,30.99 25.15,12.7 24.13,11.68 16.76,11.68 15.75,12.7
GND on TOP: 53.59,69.6 67.82,69.6 68.83,68.58 68.83,63.25 67.82,62.23 53.59,62.23 52.07,63.75 52.07,68.07
GND on BOTTOM: 62.23,68.58 79.25,68.58 81.28,66.55 81.28,19.56 76.2,14.48 76.2,12.95 57.91,12.95 57.4,13.46 57.4,15.75 50.29,22.86 25.4,22.86 25.15,23.11 25.15,13.46 24.38,12.7 15.75,12.7 10.92,17.53 10.92,60.71 12.19,61.98 18.54,61.98 19.05,62.48 19.05,67.56 20.07,68.58 58.67,68.58 59.44,67.82 59.44,65.02 61.72,65.02 61.72,68.07 ; 8 cut-outs
GND_EARTH on BOTTOM: 25.91,21.59 49.28,21.59 56.13,14.73 56.13,11.94 55.37,11.18 26.67,11.18 25.91,11.94 ; 3 cut-outs
VCC5V on TOP: 23.88,66.8 30.23,66.8 30.73,66.29 35.81,66.29 36.07,66.04 36.07,64.77 30.23,64.77 29.46,65.53 24.64,65.53 24.13,65.02 24.13,55.88 22.61,54.36 18.29,54.36 16.51,52.58 16.51,49.02 17.27,48.26 20.57,48.26 24.13,44.7 24.13,33.02 23.88,32.77 21.84,32.77 20.83,33.78 20.83,45.21 20.57,45.47 15.24,45.47 14.22,44.45 14.22,38.86 13.97,38.86 13.46,39.37 13.46,44.7 14.48,45.72 14.48,52.83 17.53,55.88 21.84,55.88 23.11,57.15 23.11,66.04
N8093259 on TOP: 13.97,34.54 14.99,34.54 15.24,34.8 17.02,34.8 17.53,35.31 17.53,38.61 18.03,39.12 20.07,39.12 20.57,38.61 20.57,29.72 19.81,28.96 17.78,28.96 16,30.73 16,31.75 15.24,32.51 14.22,32.51 13.97,32.77

## Text on the board
Ref Des/Silkscreen Bottom: SW1 | SGND | SW2 | PLS | SNG | A1 | B1 | A2 | B2 | GND | 1Wire | 3V3 | ADC2 | 5V | ADC1
Ref Des/Silkscreen Top: 3V | CL | GN | IO | 1 | BT | 0 | tx | rx | gnd
User.26: FIGURE | FINISHED_SIZE | 24.0 | 31.5 | 35.0 | 40.0 | 50.0 | 55.0 | 80.0 | 120.0 | DRILL CHART: TOP to BOTTOM | ALL UNITS ARE IN MILS | PLATED | QTY | 75 | 2 | 1 | 4 | 3 | 20 | 10 | 6 | 19
